# Altium PCB MSE-PCB-N3.PcbDoc
Units mil, origin at the board's own origin, x right, y up, seen from the top; angles counter-clockwise.
Board outline 1377.95 x 2992.13 mil, 2 copper layers (Top Layer, Bottom Layer); 78 components, 49 nets, 215 pads, 75 vias.
Unrouted connection lines stored in the file: 31.
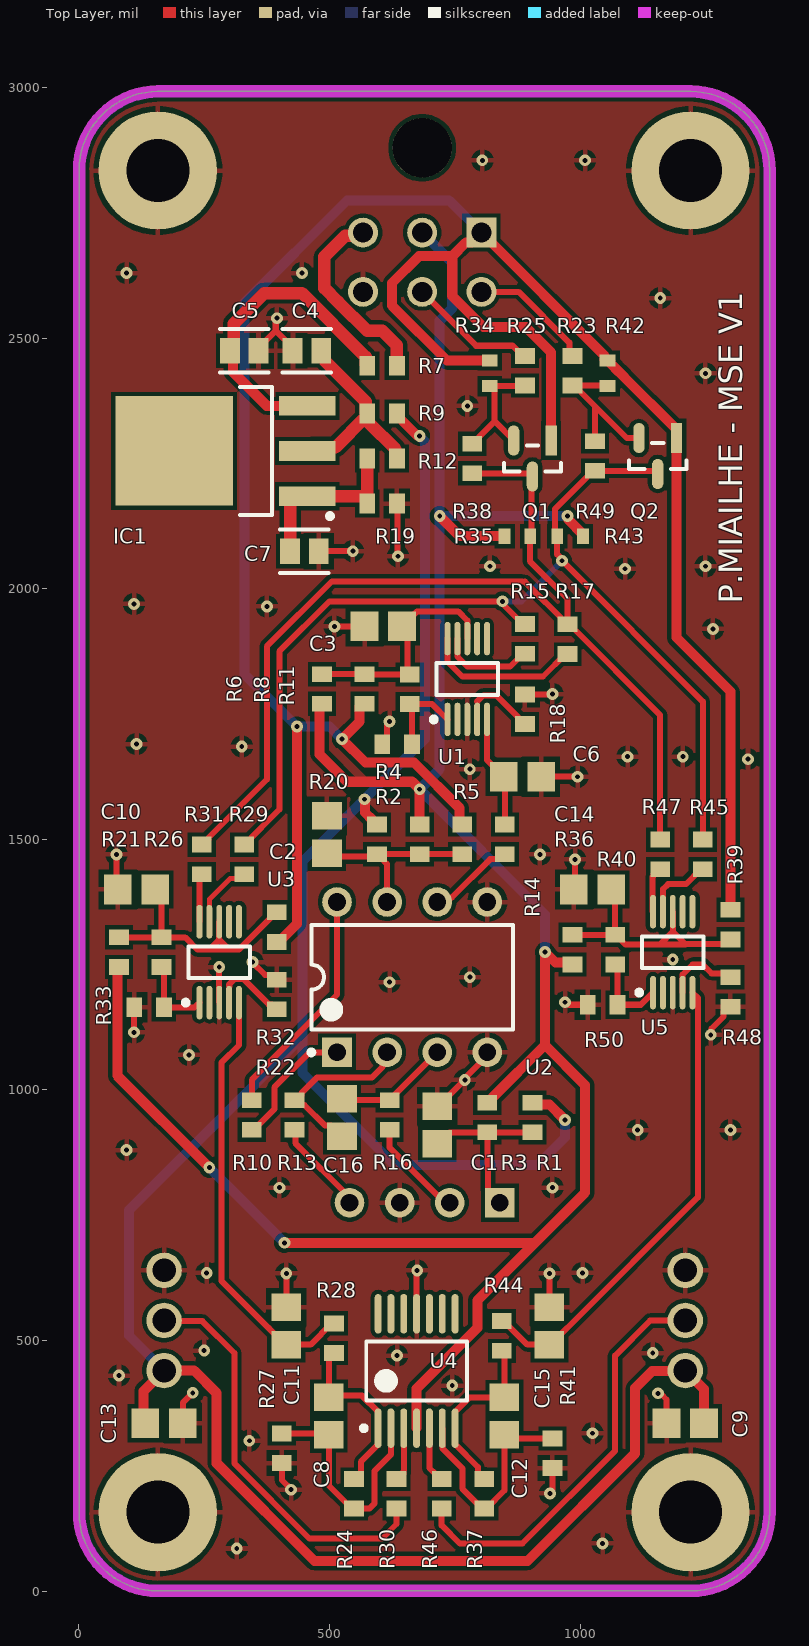
[diagram p0: Top Layer view]
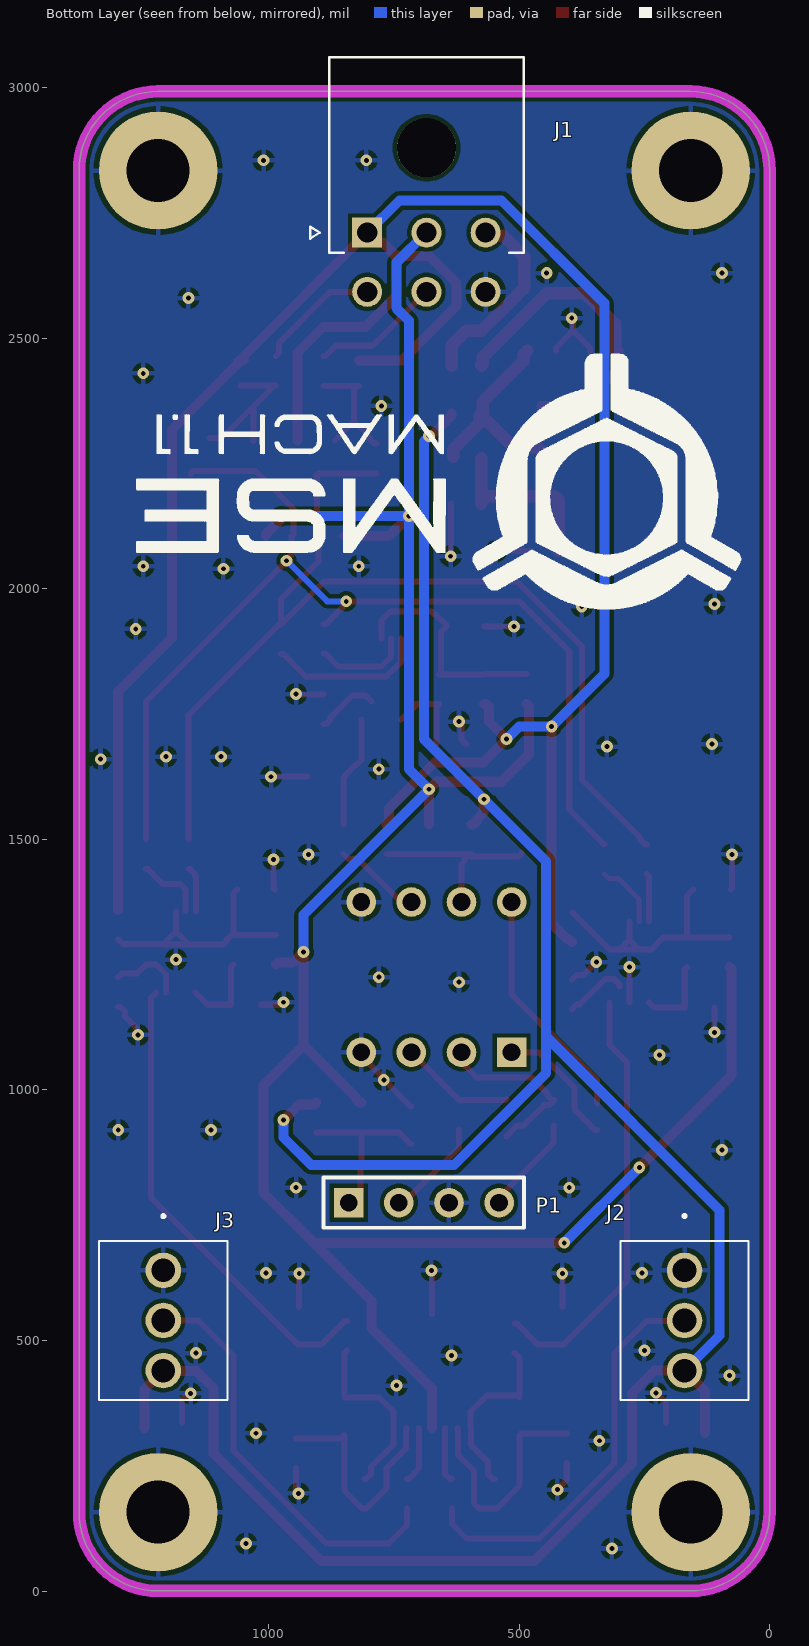
[diagram p1: Bottom Layer view, seen from below]
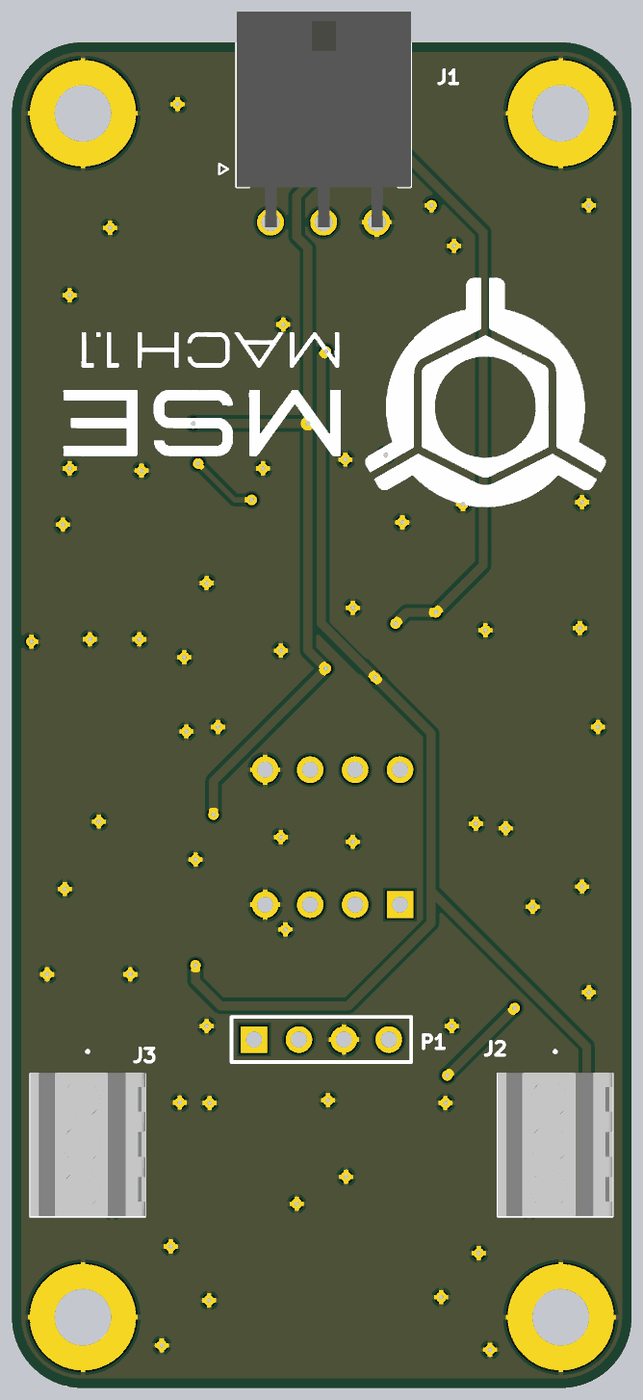
[diagram p2: 3D render of the assembled board from below, using the file's embedded part models]

## Layer stack, top to bottom
Top Solder: solder mask 0.4, Solder Resist, Dk 3.5
Top Layer: signal copper 1.4
Dielectric 1: dielectric 12.6, FR-4, Dk 4.8
Bottom Layer: signal copper 1.4
Bottom Solder: solder mask 0.4, Solder Resist, Dk 3.5

## Board outline
157.73,0.25 cw(c157.73,157.73) 0.25,157.73 0.25,2834.9 cw(c157.73,2834.9) 157.73,2992.38 1220.72,2992.38 cw(c1220.72,2834.9) 1378.2,2834.9 1378.2,157.73 cw(c1220.72,157.73) 1220.72,0.25

## Design rules (kind name [scope] priority, off if disabled: settings)
Clearance [All] p1: gap=8 ignorepadtopadclearanceinfootprint=TRUE except(0: Arc-Hole Track-Hole SMDPad-Hole THPad-Hole Via-Hole Fill-Hole Poly-Hole Region-Hole Text-Hole; 7: Arc-Arc Arc-Track Arc-SMDPad Arc-THPad Arc-Via Track-Track Track-SMDPad Track-THPad Track-Via SMDPad-SMDPad SMDPad-THPad SMDPad-Via THPad-THPad THPad-Via Via-Via; 10: Arc-Text Track-Text SMDPad-Text THPad-Text Via-Text Fill-Text Poly-Text Region-Text Text-Text)
PolygonConnect [All] p1: connectstyle=Relief reliefconductorwidth=10 reliefentries=4 polygonreliefangle="90 Angle" airgapwidth=10
RoutingVias "RoutingVias <= 0.45mm" [All] p1: holewidth=11.81 width=25.59 viastyle="Through Hole" minholewidth=9.84 minwidth=23.62 maxholewidth=17.72 maxwidth=31.5
RoutingVias "RoutingVias > 0.45" [All] p2: holewidth=19.68 width=33.47 viastyle="Through Hole" minholewidth=19.68 minwidth=33.47 maxholewidth=35.43 maxwidth=49.21
SolderMaskExpansion [All] p1: expansion=4 istentingtop=FALSE
Width [All] p1: maxlimit=30 minlimit=6 preferedwidth=10 minimp=50.000000 maximp=50.000000 favimp=50.000000
30 further rules are at their usual default settings.

## Components (designator, comment, footprint, x,y, rotation, side; value= is the part's Value field where it differs from the comment)
C1 "GRM21BR71H104KA01L" CAPC2013X135X45ML10T25 715,930 r270 top locked
C2 "GRM21BR71H104KA01L" CAPC2013X135X45ML10T25 495,1510 r270 top locked
C3 "GRM21BR71H104KA01L" CAPC2013X135X45ML10T25 607.4,1925 r0 top locked
C4 "GRM21BR61E106KA73L" FP-GRM21B-0_15-IPC_C 455,2475 r180 top locked
C5 "GRM21BR61E106KA73L" FP-GRM21B-0_15-IPC_C 330,2475 r0 top
C6 "GRM21BR71H104KA01L" CAPC2013X135X45ML10T25 885,1625 r0 top locked
C7 "GRM21BR61E106KA73L" FP-GRM21B-0_15-IPC_C 450,2075 r0 top
C8 "GRM21BR71H104KA01L" CAPC2013X135X45ML10T25 498.82,349.17 r270 top locked
C9 "GRM21BR71H104KA01L" CAPC2013X135X45ML10T25 1210,335 r0 top locked
C10 "GRM21BR71H104KA01L" CAPC2013X135X45ML10T25 115,1400 r0 top locked
C11 "GRM21BR71H104KA01L" CAPC2013X135X45ML10T25 413.82,529.17 r90 top locked
C12 "GRM21BR71H104KA01L" CAPC2013X135X45ML10T25 848.82,349.17 r270 top locked
C13 "GRM21BR71H104KA01L" CAPC2013X135X45ML10T25 170,335 r180 top locked
C14 "GRM21BR71H104KA01L" CAPC2013X135X45ML10T25 1025,1400 r0 top locked
C15 "GRM21BR71H104KA01L" CAPC2013X135X45ML10T25 938.82,529.17 r90 top locked
C16 "GRM21BR71H104KA01L" CAPC2013X135X45ML10T25 525,945 r90 top
IC1 "NCP1117DTARKG" TO229P990X238-4N 292.36,2275 r180 top locked
J1 "2125280601" MOLEX_2125280601 803.11,2710.71 r0 bottom locked
J2 "282834-3" 2828343 170,640 r270 bottom locked
J3 "282834-3" 2828343 1210,640 r270 bottom locked
P1 "26PCGFA6D" HDR1X4 840,775 r180 bottom locked
Q1 "BSS138" FP-318-08-IPC_B 905,2260 r270 top
Q2 "BSS138" FP-318-08-IPC_B 1155,2265 r270 top
R1 "0R" RESC1608X55X25ML10T15 905,945 r270 top locked
R2 "0R" RESC1608X55X25ML10T15 595,1500 r270 top locked
R3 "0R" RESC1608X55X25ML10T15 815,945 r270 top locked
R4 "0R" RESC1608X55X25ML10T15 680,1500 r270 top locked
R5 "0R" RESC1608X55X25ML10T15 765,1500 r270 top locked
R6 "0R" RESC1608X55X25ML10T15 485,1800 r270 top locked
R7 "0R" RESC1608X55X25ML10T15 605,2445 r180 top locked
R8 "0R" RESC1608X55X25ML10T15 570,1800 r270 top locked
R9 "0R" RESC1608X55X25ML10T15 605,2350 r180 top locked
R10 "GAIN" RESC1608X55X25ML10T15 345,950 r90 top
R11 "0R" RESC1608X55X25ML10T15 660,1799.53 r270 top locked
R12 "GAIN" RESC1608X55X25ML10T15 605,2260 r180 top
R13 "0R" RESC1608X55X25ML10T15 430,950 r270 top
R14 "0R" RESC1608X55X25ML10T15 850,1500 r270 top locked
R15 "0R" RESC1608X55X25ML10T15 890,1900 r90 top locked
R16 "0R" RESC1608X55X25ML10T15 620,950 r270 top locked
R17 "0R" RESC1608X55X25ML10T15 975,1899.53 r90 top locked
R18 "0R" RESC1608X55X25ML10T15 890,1759.53 r270 top locked
R19 "GAIN" RESC1608X55X25ML10T15 605,2170 r180 top
R20 "0R" RESC1608X55X25ML10T15 635,1690 r180 top locked
R21 "0R" RESC1608X55X25ML10T15 80,1275 r270 top locked
R22 "0R" RESC1608X55X25ML10T15 395,1325 r270 top locked
R23 "0R" RESC1608X55X25ML10T15 985,2435 r270 top locked
R24 "0R" RESC1608X55X25ML10T15 548.82,194.17 r270 top locked
R25 "0R" RESC1608X55X25ML10T15 890,2435 r270 top locked
R26 "0R" RESC1608X55X25ML10T15 165,1275 r270 top locked
R27 "NC" RESC1608X55X25ML10T15 405,285 r90 top locked
R28 "0R" RESC1608X55X25ML10T15 508.82,504.65 r270 top locked
R29 "0R" RESC1608X55X25ML10T15 330,1460 r90 top locked
R30 "0R" RESC1608X55X25ML10T15 633.82,194.17 r270 top locked
R31 "0R" RESC1608X55X25ML10T15 245,1460 r90 top locked
R32 "0R" RESC1608X55X25ML10T15 395,1190.47 r270 top locked
R33 "0R" RESC1608X55X25ML10T15 140,1165 r180 top locked
R34 "RC0603FR-074K7L" RESC1608X55X25LL10T15 820,2430 r90 top
R35 "RC0603FR-074K7L" RESC1608X55X25LL10T15 875,2105 r180 top
R36 "0R" RESC1608X55X25ML10T15 985,1280 r270 top locked
R37 "0R" RESC1608X55X25ML10T15 808.82,194.17 r270 top locked
R38 "NC" RESC1608X55X25ML10T15 785,2260 r270 top
R39 "0R" RESC1608X55X25ML10T15 1300,1330 r90 top
R40 "0R" RESC1608X55X25ML10T15 1070,1280 r270 top locked
R41 "NC" RESC1608X55X25ML10T15 945,275 r90 top locked
R42 "RC0603FR-074K7L" RESC1608X55X25LL10T15 1055,2430 r90 top
R43 "RC0603FR-074K7L" RESC1608X55X25LL10T15 980,2105 r0 top
R44 "0R" RESC1608X55X25ML10T15 843.82,509.17 r270 top locked
R45 "0R" RESC1608X55X25ML10T15 1245,1470 r90 top locked
R46 "0R" RESC1608X55X25ML10T15 723.82,194.17 r270 top locked
R47 "0R" RESC1608X55X25ML10T15 1160,1470 r90 top locked
R48 "0R" RESC1608X55X25ML10T15 1300,1195.47 r90 top locked
R49 "NC" RESC1608X55X25ML10T15 1030,2265 r270 top
R50 "0R" RESC1608X55X25ML10T15 1045,1170 r180 top locked
U1 "ADS1013IDGSR" TI-DGS10_N 775,1820 r90 top locked
U2 "INA121PA" P0008A 665,1225 r90 top locked
U3 "ADS1013IDGSR" TI-DGS10_N 280,1255 r90 top locked
U4 "MCP6004-I/ST" TSSOP-ST14_M 673.82,439.17 r90 top locked
U5 "ADS1013IDGSR" TI-DGS10_N 1185,1275 r90 top locked

## Footprints (in the part's own frame and the unit in brackets; to place one, negate y for a bottom-side part, rotate by r counter-clockwise, add the part's x,y. Pads: shape width x height; smd on the part's side, far side on the other; paste and mask are expansions set on the pad)
2828343 [mm]
  round 1.8 hole 1.2: 1(0,0) 2(2.54,0) 3(5.08,0)
  silkscreen extent -2.8,-3.25 6.58,3.25, body extent -1.55,-3.25 6.53,3.25, height 9.89
CAPC2013X135X45ML10T25 [mm] "Chip Capacitor, 2-Leads, Body 2.10x1.35mm, IPC Low Density"
  rect 1.4x1.5 smd: 1(-0.95,0) 2(0.95,0)
  body extent -1.05,-0.67 1.05,0.67, height 1.35
FP-318-08-IPC_B [mm]
  rect 1.524x0.578 smd paste+0 mask+0: 1(-0.91,0.95)
  rrect100% 1.524x0.578 smd paste+0 mask+0: 2(-0.91,-0.95) 3(0.91,0)
  silkscreen extent -0.65,-1.45 0.65,1.45, body extent -1.92,-1.7 1.92,1.7, height 0.25
FP-GRM21B-0_15-IPC_C [mil]
  rect 39.6x51.5 smd paste+0 mask+0: 1(-28.59,0) 2(28.59,0)
  silkscreen extent -48,-43 48,43, body extent -52,-31 52,31, height 10
HDR1X4 [mm] "Connector; Header; 4 Position"
  rect 1.5x1.5 hole 0.9: 1(0,0)
  round 1.5 hole 0.9: 2(2.54,0) 3(5.08,0) 4(7.62,0)
  silkscreen extent -1.27,-1.27 8.89,1.27
MOLEX_2125280601 [mm]
  rect 1.52x1.52 / inner round 1.52 / far side rect 1.52x1.52 hole 1.02 mask+0.076: 1(0,0)
  round 1.52 hole 1.02 mask+0.076: 2(-3,0) 3(-6,0) 4(0,3) 5(-3,3) 6(-6,3)
  round 3 hole 3 unplated mask+0.076: ""(-3,-4.3)
  silkscreen extent -7.93,-8.9 2.9,1.01, body extent -7.94,-8.89 1.91,3.29, height 8.81
P0008A [mm] "DIP, 8-Leads, Body 10.15x6.6mm, Pitch 2.54mm"
  rect 1.5x1.5 hole 0.9: 1(-3.81,3.81)
  round 1.5 hole 0.9: 2(-3.81,1.27) 3(-3.81,-1.27) 4(-3.81,-3.81) 5(3.81,-3.81) 6(3.81,-1.27) 7(3.81,1.27) 8(3.81,3.81)
  silkscreen extent -3.93,-5.1 2.65,5.23, body extent -3.95,-5.07 3.95,5.07, height 5.08
RESC1608X55X25LL10T15 [mm] "Chip Resistor, 2-Leads, Body 1.60x0.80mm, IPC High Density"
  rect 0.6x0.8 smd: 1(-0.65,0) 2(0.65,0)
  body extent -0.85,-0.45 0.85,0.45, height 0.55
RESC1608X55X25ML10T15 [mm] "Chip Resistor, 2-Leads, Body 1.60x0.80mm, IPC Low Density"
  rect 0.8x1 smd: 1(-0.75,0) 2(0.75,0)
  body extent -0.85,-0.45 0.85,0.45, height 0.55
TI-DGS10_N [mm] "SOP, 10-Leads, Body 3x3mm, Pitch 0.5mm, IPC Medium Density"
  oval 1.7x0.3 smd: 1(-2.05,1) 2(-2.05,0.5) 3(-2.05,0) 4(-2.05,-0.5) 5(-2.05,-1) 6(2.05,-1) 7(2.05,-0.5) 8(2.05,0) 9(2.05,0.5) 10(2.05,1)
  silkscreen extent -2.17,-1.55 0.8,1.82, body extent -1.55,-1.55 1.55,1.55, height 1.1
TO229P990X238-4N [mm]
  rect 2.85x1 smd: 1(-4.15,2.29) 2(-4.15,0) 3(-4.15,-2.29)
  rect 5.95x5.55 smd: 4(2.6,0)
  silkscreen extent -5.43,-3.25 -0.75,3.42, body extent -4.96,-3.27 4.96,3.27, height 2.39
TSSOP-ST14_M [mm] "TSOP, 14-Leads, Body 5x4.4mm, Pitch 0.65mm, IPC Low Density"
  oval 2x0.35 smd: 1(-2.9,1.95) 2(-2.9,1.3) 3(-2.9,0.65) 4(-2.9,0) 5(-2.9,-0.65) 6(-2.9,-1.3) 7(-2.9,-1.95) 8(2.9,-1.95) 9(2.9,-1.3) 10(2.9,-0.65) 11(2.9,0) 12(2.9,0.65) 13(2.9,1.3) 14(2.9,1.95)
  silkscreen extent -3.02,-2.55 1.5,2.8, body extent -2.25,-2.55 2.25,2.55, height 1.2

## Part data
C1 C2 C3 C9 C10 C13 C14: library part CMP-2100-03644-1, "Chip Capacitor, 0.1 uF, +/- 10%, 50 V, -55 to 125 degC, 0805 (2012 Metric), RoHS, Tape and Reel", Capacitance=100nF, Case Code (Imperial)=0805, Case Code (Metric)=2012, Dielectric=X7R, Dielectric Material=Ceramic, Insulation Resistance=10GR, Manufacturer=Murata, Max Operating Temperature=125degC, Min Operating Temperature=-55degC, Package Description="2-Pin Surface Mount Device, Body 2 x 1.25 mm", Package Quantity=1, Tolerance=10%, Voltage=50V, Case/Package=0805, Datasheet URL=http://psearch.en.murata.com/capacitor/product/GRM21BR71H104KA01%23.pdf, Datasheet Version=42675.0, Depth=1.25mm, Height=1.25mm, Lead Free=LeadFree, Length=2mm, Manufacturer URL=http://www.murata.com/, Material=Ceramic, Mount=SurfaceMount, Number of Pins=2, Package Reference=0805, Packaging=TapeandReel, Radiation Hardening=No, REACH SVHC=Unknown, RoHSCompliant=true, Termination=SMD/SMT, Thickness=0.053inch, Voltage Rating=50V, Voltage Rating (DC)=50V, Width=0.049inch
C4 C5 C7: library part CMP-2007-03541-2, "Chip Multilayer Ceramic Capacitors for General Purpose, 0805, 10uF, X5R, 15%, 10%, 25V", Capacitance=10uF, Case Code (Imperial)=0805, Case Code (Metric)=2012, Dielectric=X5R, Max Operating Temperature=85°C, Min Operating Temperature=-55°C, Package Quantity=1, Tolerance=10%, Voltage=25V, Case/Package=0805, Depth=1.25mm, Height=1.25mm, Lead Free="Lead Free", Length=2mm, Material=Ceramic, Mount="Surface Mount", Packaging="Tape and Reel", Radiation Hardening=No, Termination=SMD/SMT, Thickness=0.053inch, Voltage Rating=25V, Voltage Rating (DC)=25V, Width=0.049inch
C6 C8 C11 C12 C15 C16: library part CMP-2100-03644-1, "Chip Capacitor, 0.1 uF, +/- 10%, 50 V, -55 to 125 degC, 0805 (2012 Metric), RoHS, Tape and Reel", Capacitance=NC, Case Code (Imperial)=0805, Case Code (Metric)=2012, Dielectric=X7R, Dielectric Material=Ceramic, Insulation Resistance=10GR, Manufacturer=Murata, Max Operating Temperature=125degC, Min Operating Temperature=-55degC, Package Description="2-Pin Surface Mount Device, Body 2 x 1.25 mm", Package Quantity=1, Tolerance=10%, Voltage=50V, Case/Package=0805, Datasheet URL=http://psearch.en.murata.com/capacitor/product/GRM21BR71H104KA01%23.pdf, Datasheet Version=42675.0, Depth=1.25mm, Height=1.25mm, Lead Free=LeadFree, Length=2mm, Manufacturer URL=http://www.murata.com/, Material=Ceramic, Mount=SurfaceMount, Number of Pins=2, Package Reference=0805, Packaging=TapeandReel, Radiation Hardening=No, REACH SVHC=Unknown, RoHSCompliant=true, Termination=SMD/SMT, Thickness=0.053inch, Voltage Rating=50V, Voltage Rating (DC)=50V, Width=0.049inch
IC1: "Integrated Circuit", Manufacturer_Name=onsemi, Mouser Part Number=863-NCP1117DTARKG, Arrow Part Number=NCP1117DTARKG, Arrow Price/Stock=https://www.arrow.com/en/products/ncp1117dtarkg/on-semiconductor?region=nac, Datasheet Link=http://www.onsemi.com/pub/Collateral/NCP1117-D.PDF, Height=2.38mm, Manufacturer_Part_Number=NCP1117DTARKG, Mouser Price/Stock=https://www.mouser.co.uk/ProductDetail/onsemi/NCP1117DTARKG?qs=Gev%252BmEvV0iZIb8c1g2fW3A%3D%3D
J1: library part CMP-013-000000-2, "Connector Header Through Hole, Right Angle 6 position 0.118 (3.00mm)", Package=None, Availability="In Stock", Check_prices=https://www.snapeda.com/parts/2125280601/Molex/view-part/?ref=eda, Component Type=Standard, Design Item ID=2125280601, MF=Molex, MP=2125280601, Pin Count=6, Price=None, Purchase-URL=https://pricing.snapeda.com/search/part/2125280601/?ref=eda, SnapEDA_Link=https://www.snapeda.com/parts/2125280601/Molex/view-part/?ref=snap, Source=2125280601.SchLib
J2 J3: "Connector", Manufacturer_Name="TE Connectivity", Mouser Part Number=571-2828343, Arrow Part Number=282834-3, Arrow Price/Stock=https://www.arrow.com/en/products/282834-3/te-connectivity?region=europe, Datasheet Link=https://www.te.com/commerce/DocumentDelivery/DDEController?Action=showdoc&DocId=Customer+Drawing%7F282834%7FC1%7Fpdf%7FEnglish%7FENG_CD_282834_C1.pdf%7F282834-3, Height=10mm, Manufacturer_Part_Number=282834-3, Mouser Price/Stock=https://www.mouser.co.uk/ProductDetail/TE-Connectivity/282834-3?qs=A%252Bip%252BNCYi6M69kAjqV38yA%3D%3D
P1: library part "Header 4", "Header, 4-Pin", LatestRevisionDate=17-Jul-2002, LatestRevisionNote="Re-released for DXP Platform.", Publisher="Altium Limited"
Q1 Q2: library part CMP-07173-000101-1, "MOSFET N-CH 50V 220MA SOT-23", Case/Package=SOT-23, Continuous Drain Current (ID)=220mA, Drain to Source Breakdown Voltage=50V, Drain to Source Resistance=3.5R, Gate to Source Voltage (Vgs)=20V, Input Capacitance=27pF, Max Operating Temperature=150°C, Max Power Dissipation=360mW, Min Operating Temperature=-55°C, On-State Resistance=6R, Package Quantity=1, Threshold Voltage=1.3V, Contact Plating=Tin, Current Rating=220mA, Drain to Source Voltage (Vdss)=50V, Dual Supply Voltage=50V, Element Configuration=Single, Fall Time=9ns, Height=0.93mm, Lead Free="Lead Free", Length=2.92mm, Mount="Surface Mount", Nominal Vgs=1.3V, Number of Elements=1, Number of Pins=3, Packaging="Tape and Reel", Power Dissipation=360mW, Radiation Hardening=No, Rds On Max=3.5R, REACH SVHC="No SVHC", Rise Time=9ns, Termination=SMD/SMT, Turn-Off Delay Time=20ns, Turn-On Delay Time=2.5ns, Voltage Rating (DC)=50V, Weight=0.03g, Width=1.3mm
R1 R2 R3 R4 R5 R6 R7 R8 R9 R10 R11 R12 R13 R14 R15 R16 R17 R18 R19 R20 R21 R22 R23 R24 R25 R26 R27 R28 R29 R30 R31 R32 R33 R36 R37 R38 R39 R40 R41 R44 R45 R46 R47 R48 R49 R50: library part CMP-2100-03667-1, "Chip Resistor, 0 Ohm, +/- 5%, 0.1 W, -55 to 155 degC, 0603 (1608 Metric), RoHS, Tape and Reel", Case Code (Imperial)=0603, Case Code (Metric)=1608, Manufacturer=Yageo, Max Operating Temperature=155degC, Min Operating Temperature=-55degC, Package Description="2-Pin Surface Mount Device, Body 1.6 x 0.8 mm", Package Quantity=5000, Power Rating=100mW, Resistance=0mOhm, Temperature Coefficient=200ppm/degreesC, Tolerance=5%, Voltage Rating=50V, Case/Package=0603, Composition=ThickFilm, Contact Plating=Tin, Datasheet URL=http://www.yageo.com/NewPortal/yageodocoutput?fileName=/pdf/R-Chip/PYu-RC_Group_51_RoHS_L_5.pdf, Datasheet Version="Rev. 5, 10/2016", Depth=0.8mm, Height=0.45mm, Lead Free=LeadFree, Length=1.6mm, Manufacturer URL=http://www.yageo.com/, Military Standard=Not, Number of Pins=2, Package Reference=0603, Packaging=TapeandReel, Radiation Hardening=No, REACH SVHC=NoSVHC, RoHSCompliant=true, Termination=SMD/SMT, Voltage Rating (DC)=50V, Width=0.8mm
R34 R35 R42 R43: library part CMP-2000-06942-1, "Chip Resistor, 4.7 KOhm, +/- 1%, 0.1 W, -55 to 155 degC, 0603 (1608 Metric), RoHS, Tape and Reel", Case Code (Imperial)=0603, Case Code (Metric)=1608, Manufacturer=Yageo, Max Operating Temperature=155°C, Max Power Dissipation=100mW, Min Operating Temperature=-55°C, Operating Temperature Range=-55Cto+155C, Package Description="2-Pin Surface Mount Device, Body 1.6 x 0.8 mm", Resistance=4.7k, Resistance Tolerance=1%, Resistor Type="Thick Film", Supplier Part Number 1=603-RC0603FR-074K7L, Temperature Coefficient=100PPM/C, Voltage Rating=50V, Case Code - mm=1608, Case/Package=0603, Category="Chip SMD Resistors", ComponentLink1Description=https://datasheet.ciiva.com/15189/getdatasheetpartid-422754-15189760.pdf?src-supplier=Verical, ComponentLink1URL=https://datasheet.ciiva.com/15189/getdatasheetpartid-422754-15189760.pdf?src-supplier=Verical, ComponentLink2Description=https://datasheet.ciiva.com/22747/443971-22747528.pdf?src-supplier=Element14, ComponentLink2URL=https://datasheet.ciiva.com/22747/443971-22747528.pdf?src-supplier=Element14, ComponentLink3Description=https://datasheet.ciiva.com/7660/38590-7660794.pdf?src-supplier=Element14, ComponentLink3URL=https://datasheet.ciiva.com/7660/38590-7660794.pdf?src-supplier=Element14, ComponentLink4Description=https://datasheet.ciiva.com/7746/1868787-7746365.pdf?src-supplier=Element14, ComponentLink4URL=https://datasheet.ciiva.com/7746/1868787-7746365.pdf?src-supplier=Element14, ComponentLink5Description=https://datasheet.ciiva.com/46440/1868787-46440909.pdf?src-supplier=Element14, ComponentLink5URL=https://datasheet.ciiva.com/46440/1868787-46440909.pdf?src-supplier=Element14, ComponentLink6Description=https://datasheet.ciiva.com/7746/1738695-7746366.pdf?src-supplier=Element14, ComponentLink6URL=https://datasheet.ciiva.com/7746/1738695-7746366.pdf?src-supplier=Element14, Construction=Rectangular, Datasheet URL=http://www.yageo.com/documents/recent/PYu-RC_Group_51_RoHS_L_7.pdf, Datasheet Version="Rev. 7, 05/2017", Depth=0.8mm, Features="Moisture Resistant", Height=0.45mm, Lead Free="Lead Free", Lead Pitch=0.3mm, Length=1.6mm, Manufacturer Part Number=RC0603FR-074K7L, Manufacturer URL=http://www.yageo.com/, Military Standard=Not, Mounting Technology=SurfaceMount, Number of Pins=2, Number of Terminations=2, Package Reference=0603, Packaging=Reel, Power Rating=100mW, Pricing 1="1=0,10000, 10=0,02400, 50=0,02400, 100=0,01000, 1000=0,00400, 5000=0,00300, 10000=0,00300 (USD)", Product=ThickFilmResistorsGeneralPurpose, REACH SVHC="No SVHC", RoHS=Yes, RoHS Compliant=Yes, Series=RC, Size Code=0603, Stock 1=772810, Supplier 1=Mouser, Termination=SMD/SMT, Termination Style=SMD/SMT, Tolerance=1%, Voltage Rating (DC)=50V, Width=0.8mm
U1 U3 U5: library part CMP-0003-00388-2, "12-Bit ADC with Integrated Oscillator, and Reference, -40 to 125 degC, 10-pin SOP (DGS10), Green (RoHS & no Sb/Br)", Analog Voltage AV/DD(Max)(V)=5.5, Analog Voltage AV/DD(Min)(V)=2, Manufacturer="Texas Instruments", # Input Channels=1, Architecture=Delta-Sigma, Code_JEDEC=MO-153, ComponentLink1Description="Manufacturer URL", ComponentLink1URL=http://www.ti.com/, ComponentLink2Description=Datasheet, ComponentLink2URL=http://www.ti.com/general/docs/lit/getliterature.tsp?genericPartNumber=ADS1013&fileType=pdf, ComponentLink3Description="Package Specification", ComponentLink3URL=http://www.ti.com/lit/ml/mpds035b/mpds035b.pdf, DatasheetVersion=SBAS473C, Digital Supply(Max)(V)=5.5, Digital Supply(Min)(V)=2, Eco-Plan="Green (RoHS & no Sb/Br)", INL(Max)(+/-LSB)=0.5, Interface="Serial I2C", Mounting Technology="Surface Mount", PackageDescription="10-Pin Plastic Small Outline, Body 3 x 3 mm, Pitch 0.5 mm", PackageReference=DGS10, PackageVersion="4073272/C, 02/2004", PartNumber=ADS1013IDGSR, Resolution(Bits)=12, Sample Rate (max)(SPS)=3.3k, SubFamily="Precision ADC (<=10MSPS)"
U2: library part CMP-0992-00120-2, "FET-Input, Low Power Instrumentation Amplifier, -40 to 85 degC, 8-pin DIP (P8), Green (RoHS & no Sb/Br)", Input Bias Current (+/-)(Max)(nA)=0.05, Manufacturer="Texas Instruments", Quiescent Current (+/-)(Typ)(mA)=0.45, CMRR(Min)(dB)=90, Code_JEDEC=MS-001, ComponentLink1Description="Manufacturer URL", ComponentLink1URL=http://www.ti.com/, ComponentLink2Description=Datasheet, ComponentLink2URL=http://www.ti.com/general/docs/lit/getliterature.tsp?genericPartNumber=INA121&fileType=pdf, ComponentLink3Description="Package Specification", ComponentLink3URL=http://www.ti.com/litv/pdf/mpdi001b, DatasheetVersion=SBOS078, Eco-Plan="Green (RoHS & no Sb/Br)", Gain(V/V)="1 to 10000", Input Offset (+/-)(Max)(uV)=1000, Input Offset Drift (+/-)(Max)(uV/Degrees Celsius)=15, Mounting Technology="Through Hole", Noise at 1kHz(Typ)(nV/rt(Hz))=20, Non-Linearity (+/-)(Max)(%)=0.008, Number of Channels=1, Output Offset (+/-)(Max)(uV)=1000/G, Output Offset Drift (+/-)(Max)(uV/Degrees Celsius)=20/G, PackageDescription="8-Pin Plastic In-Line, Body 9.59 x 6.35 mm, Pitch 2.54 mm", PackageReference=P0008A, PackageVersion="4040082/E, 04/2010", PartNumber=INA121PA, SubFamily="Dual Supply", Vs(Max)(V)=36, Vs(Min)(V)=4.5
U4: library part CMP-0187-00579-3, "None", Case/Package=TSSOP, Frequency=3MHz, Input Bias Current=1pA, Input Offset Voltage (Vos)=4.5mV, Max Operating Temperature=85°C, Max Supply Voltage=6V, Min Operating Temperature=-40°C, Min Supply Voltage=1.8V, Nominal Supply Current=100uA, Operating Supply Voltage=5.5V, Output Current=23mA, Package Quantity=96, Power Supply Rejection Ratio (PSRR)=86dB, Voltage Gain=112dB, Amplifier Type="GENERAL PURPOSE", Bandwidth=1MHz, Common Mode Rejection Ratio=60dB, Contact Plating=Tin, Gain Bandwidth Product=1MHz, Height=0.9mm, Input Offset Voltage-Max=4.5mV, Lead Free="Lead Free", Length=5mm, Mount="Surface Mount", Number of Amplifiers=4, Number of Channels=4, Number Of Circuits=4, Number of Elements=4, Number of Pins=14, Packaging=Rail/Tube, Radiation Hardening=No, REACH SVHC="No SVHC", RoHS Compliant=Yes, Slew Rate=0.6V/µs, Slew Rate-Nom=0.6V/µs, Supply Current=100uA, Technology=CMOS, Unity Gain Bandwidth Product=1MHz, Width=4.4mm

## Free pads (board coordinates)
  round 236.22 hole 125.98: 8(157.48,157.48) 8(157.48,2834.65) 8(1220.47,157.48) 8(1220.47,2834.65)

## Via types
v1: diameter 23.62, hole 9.84, Top Layer to Bottom Layer, 75 vias

## Nets (pads, with @x,y where several pads share a name; then routed paths per layer and width w, separated by ;. In a path a pad name is that pad's centre, name@x,y a point inside that pad or via, vN(x,y) a via of type N, cw(c..) or ccw(c..) an arc to the next point about the centre after c; other vN are vias at no path point)
+3V3: J1.1 Q1.1 Q2.1 R5.1 R8.2 R22.2 R34.2 R39.2 R42.2 | length 5004.4
  Top Layer w20: R22.2 400.75,1301.22 404.69,1301.22 435,1331.54 v1(435,1725) ; R8.2 566.06,1770.47 560.31,1764.72 560.31,1735.31 v1(525,1700) 571.69,1653.31 668.84,1653.31 759.89,1562.27 759.89,1534.64 R5.1 ; J1.1@802.86,2710.46 783.19,2690.79 772,2690.79 745,2663.79 ; J1.1 1049.25,2464.57 1049.25,2457.4 1051.06,2455.59 R42.2 R42.2@1058.23,2455.59 ; R34.2 734.41,2455.59 625,2565 625,2610 678.79,2663.79 745,2663.79 ; Q1.1 942.4,2471.6 891.62,2522.38 806.97,2522.38 745,2584.35 745,2663.79 ; R42.2@1058.94,2455.59 1060.75,2453.78 1060.75,2449.84 1077.37,2433.22 1077.79,2433.22 1087.75,2423.26 1087.75,2422.84 1189.75,2320.84 1192.4,2318.19 Q2.1 1192.4,1902.6 1300,1795 R39.2
  Bottom Layer w20: v1(435,1725) 330,1830 330,2570 535,2775 738.82,2775 J1.1 ; v1@435.98,1725 500,1725 v1(525,1700)
+5V: J1.2 R3.1 R4.1 R6.2 R21.2 R35.2 R36.2 R43.2 U4.4 | length 4986.9
  Top Layer w20: R21.2 76.72,1242.2 76.72,1028.46 v1(260.19,845) ; v1(410,695) 910,695 ; R6.2 480.19,1765.66 480.19,1669.81 535,1615 665,1615 v1(680,1600) R4.1 ; U4.4 673.82,403.82 795,525 795,580 910,695 ; v1(720,2145) 760,2105 R35.2 ; R3.1 818.94,974.53 824.69,980.28 824.69,984.21 930,1089.53 ; v1(930,1275) 930,1089.53 ; v1@930.69,1274.31 950.83,1254.17 981.31,1254.17 R36.2 ; v1(975,2145) 975.69,2144.31 975.69,2138.83 1005.59,2108.94 R43.2 ; 910,695 1010,795 1010,1009.53 930,1089.53
  Bottom Layer w20: v1@260.88,844.31 260.88,844.21 410,695.09 v1(410,695) ; J1.2 745,2650.71 745,2560 720,2535 v1(720,2145) ; v1(930,1275) 930,1350 v1(680,1600) 720,1640 v1(720,2145) ; v1(975,2145) v1(720,2145)
+12V: C9.2 C13.2 J2.3 J3.3 R1.1 R2.1 R9.1 | length 4863.2
  Top Layer w20: C13.2@129.29,315 129.29,399.29 J2.3 230,440 275,395 275,255 470,60 895,60 1110,275 1110,405 1143.73,438.73 1208.73,438.73 J3.3 1210.25,440 1247.4,402.85 C9.2 C9.2@1247.4,325 ; v1(570,1580) 570.69,1579.31 570.69,1553.83 585.31,1539.21 585.31,1535.28 591.06,1529.53 R2.1 ; R9.1 634.53,2346.06 674.9,2305.69 679.31,2305.69 v1(680,2305) ; R1.1 908.69,970.83 939.17,970.83 v1@969.31,940.69
  Bottom Layer w20: J2.3 100,510 100,760 444,1104 ; v1(680,2305) 680,2304.02 690.19,2293.83 690.19,1700.19 v1(570,1580) 446,1456 446,1104 446,1034 630,850 915,850 970,905 v1(970,940)
+VIN: J1.3 R7.1 | length 392.3
  Top Layer w25: J1.3 560.22,2704.04 531.08,2704.04 490,2662.96 490,2600 517.47,2572.53 517.47,2572.13 546.42,2543.18 546.82,2543.18 575,2515 605,2515 634.53,2485.47 R7.1
GND: C1.1 C2.1 C3.1 C4.2 C5.2 C6.2 C7.2 C9.1 C10.1 C11.2 C13.1 C14.1 C15.2 J1.6 J2.1 J3.1 P1.3 pad.8 R18.1 R19.1 R20.2 R27.1 R32.1 R33.2 R41.1 R48.1 R50.2 U1.3 U2.4 U2.5 U3.3 U4.11 U5.3 | length 1609.7
  Top Layer w12: v1(75,1470) 75,1402.6 C10.1 ; v1(110,1115) 110.24,1115.24 110.24,1164.76 R33.2 ; C13.1 207.4,375.86 v1(227.19,395.65) ; U3.3 v1(280,1245) ; v1(346.06,1255) 371.31,1229.75 385.25,1229.75 R32.1 ; C5.2 358.59,2480.95 392.78,2515.14 ; v1(395,2540) 392.78,2537.78 392.78,2515.14 ; R27.1 405,221.72 423.49,203.23 v1(423.49,202.29) ; C11.2 v1(413.82,633.82) ; C4.2 426.41,2480.95 392.78,2514.59 392.78,2515.14 ; C7.2 v1(546.54,2075) ; v1(510,1925) C3.1 ; R20.2 615.22,1699.75 615.22,1727.08 620,1731.86 v1(620,1735) ; R19.1 635.53,2169 635.53,2066 v1(636.54,2065) ; U4.11 673.82,638.82 v1(675,640) ; C1.1 716.97,967.4 769.57,1020 v1(770,1020) 770,1023.14 815,1068.14 U2.4 ; R18.1 890.47,1789.53 944.53,1789.53 v1(945,1790) ; C6.2 v1(995,1625) ; C15.2 v1(938.82,633.82) ; v1(940,195) 940,198.14 945,203.14 R41.1 ; v1(970,1175) 973.14,1175 978.14,1170 R50.2 ; C14.1 990,1402.4 v1(990,1460) ; v1(1155.37,394.63) 1157.6,392.4 1162.42,392.4 1172.6,382.23 C9.1 ; v1@1184.68,1259.68 v1(1185,1260) ; v1(1260.81,1110) 1262.22,1111.41 1262.22,1122.22 1286.31,1146.31 1286.31,1156.2 1296.06,1165.94 R48.1
  other v1: 315,85 1045,95 340,300 1025,315 745,410 80,430 635,470 1145,475 250,480 255,635 1005,635 400,805 945,805 95,880 1115,920 1300,920 220,1070 620,1215 780,1225 920,1470 780,1640 1335,1660 1095,1665 1205,1665 325,1685 115,1690 1265,1920 375,1965 110,1970 1090,2040 820,2045 1250,2045 775,2365 1250,2430 1160,2580 95,2630 445,2630 805,2855 1010,2855
NetC1_2: C1.2 P1.1 R1.2 R3.2 | length 350.3
  Top Layer w12: C1.2 716.97,892.6 739.84,915.47 R3.2 ; P1.1 816.47,798.53 816.47,851.39 815,852.86 R3.2 ; R1.2 R3.2
NetC2_2: C2.2 R2.2 R4.2 R5.2 U2.7 | length 380.3
  Top Layer w12: C2.2 502.13,1465.47 595,1465.47 R2.2@596.25,1465.47 ; U2.7 615,1450.47 608.69,1456.79 608.69,1460.72 598.94,1470.47 R2.2 R4.2 R5.2
NetC3_2: C3.2 R6.1 R8.1 R11.1 U1.8 | length 462.8
  Top Layer w12: R6.1 R8.1 570.24,1829.29 R11.1@655.83,1829.29 ; R11.1 659.76,1829.29 R11.1@655.83,1829.29 ; U1.8 775,1936.73 756.73,1955 674.8,1955 668.33,1948.53 666.36,1948.53 644.8,1926.97 C3.2 655.83,1913.98 R11.1@655.83,1829.29
NetC4_1: C4.1 IC1.2 R9.2 R12.1 | length 421.4
  Top Layer w25: IC1.2 462.93,2282.19 511.59,2282.19 572.22,2342.81 R9.2@572.22,2346.75 ; C4.1 490.89,2467.7 490.89,2454.85 572.22,2373.52 572.22,2353.25 578.72,2346.75 578.72,2331.28 631.28,2278.72 R12.1@631.28,2263.25
NetC5_1: C5.1 IC1.3 R7.2 | length 640.5
  Top Layer w20: C5.1 307.19,2469.22 307.19,2432.81 321.79,2418.21 374.84,2365.16 IC1.3
  Top Layer w25: C5.1@305.97,2471.07 308.71,2473.81 308.71,2528.71 370,2590 444.75,2590 572.22,2462.52 572.22,2448.25 R7.2
NetC6_1: C6.1 R14.1 U1.5 | length 225.6
  Top Layer w12: U1.5@814.59,1739.29 814.59,1658.01 824.07,1648.53 826.04,1648.53 847.6,1626.97 C6.1 850,1622.6 R14.1
NetC7_1: C7.1 IC1.1 R12.2 R19.2 | length 354.2
  Top Layer w25: C7.1 421.41,2177.66 428.59,2184.84 IC1.1 564.57,2184.84 R19.2@575.47,2173.94 ; R19.2 R19.2@575.47,2173.94 ; R12.2 R19.2@575.47,2173.94
NetC8_1: C8.1 R24.1 R28.2 U4.1 | length 362
  Top Layer w12: R28.2 508.57,475.12 498.82,465.37 C8.1 502.24,390 564.53,390 597.05,357.48 U4.1 596.47,324.42 596.47,291.94 562.5,257.98 562.5,233.45 552.76,223.7 R24.1
NetC8_2: C8.2 R24.2 R27.2 U4.2 | length 474.1
  Top Layer w12: R27.2 496.06,314.53 C8.2 498.82,210.71 544.88,164.65 R24.2 579.65,164.65 590,175 590,240 622.3,272.3 622.3,324.66 U4.2
NetC10_2: C10.2 R21.1 R22.1 R26.1 U3.8 | length 547.7
  Top Layer w12: R21.1 R26.1 ; C10.2 165,1387.4 R26.1 ; U3.8 280,1299.68 ; 300,1279.97 299.71,1279.97 ; R22.1@393.9,1354.53 319.34,1279.97 299.71,1279.97 ; R26.1 212.08,1304.53 236.64,1279.97 260.29,1279.97 ; 260.29,1279.97 299.71,1279.97 ; 260.29,1279.97 280,1299.68 ; 280,1299.68 299.71,1279.97
NetC11_1: C11.1 R28.1 U3.5 | length 863.9
  Top Layer w12: U3.5 319.37,1089.37 285,1055 285,618.51 378.78,524.73 378.89,524.73 411.85,491.77 C11.1 462.48,491.77 504.88,534.17 R28.1
NetC12_1: C12.1 R37.1 R44.2 U4.7 | length 365.2
  Top Layer w12: R37.1 805.66,223.7 795.91,233.45 795.91,247.68 750.59,293 U4.7 750.59,357.48 779.68,386.57 C12.1 848.82,474.65 R44.2
NetC12_2: C12.2 R37.2 R41.2 U4.6 | length 462.6
  Top Layer w12: U4.6 725.34,324.66 725.34,284.66 765,245 765,204.53 804.88,164.65 812.76,164.65 848.82,200.71 C12.2 856.06,304.53 R41.2
NetC14_2: C14.2 R36.1 R39.1 R40.1 U5.8 | length 535.2
  Top Layer w12: R36.1 R40.1 ; C14.2 1070,1392.4 R40.1 ; U5.8 1185,1316.14 ; R39.1 1290.67,1291.14 1210,1291.14 ; R40.1 1073.94,1309.53 1083.69,1299.78 1083.69,1297.03 1090.71,1290 1158.86,1290 ; 1158.86,1290 1210,1290 1210,1291.14 ; 1158.86,1290 1185,1316.14 ; 1185,1316.14 1210,1291.14
NetC15_1: C15.1 R44.1 U5.5 | length 945.3
  Top Layer w12: R44.1 847.76,538.7 894.69,491.77 C15.1 940.79,491.77 973.75,524.73 973.86,524.73 1235,785.87 1235,1183.66 U5.5
NetC16_1: C16.1 R13.1 U2.2 | length 363.4
  Top Layer w12: C16.1 503.44,929.16 490.84,929.16 450.22,969.78 439.75,969.78 R13.1 433.94,979.53 443.69,989.28 443.69,993.21 475.47,1025 585,1025 606,1046 606,1066 U2.2
NetC16_2: C16.2 R16.1 U2.3 | length 235.9
  Top Layer w12: C16.2 527.87,979.53 R16.1@619.41,979.53 ; R16.1@615,979.06 618.94,979.06 R16.1@619.41,979.53 ; R16.1 R16.1@619.41,979.53 ; U2.3 714.88,1075 R16.1@619.41,979.53
NetJ1_4: J1.4 R23.1 | length 246.9
  Top Layer w12: J1.4 877.4,2592.6 978.75,2491.25 978.75,2470.77 R23.1
NetJ1_5: J1.5 R25.1 | length 258
  Top Layer w12: J1.5 792.6,2485 865.59,2485 886.06,2464.53 R25.1
NetJ2_2: J2.2 R30.2 | length 815.6
  Top Layer w12: J2.2 171.4,538.6 246.4,538.6 310,475 310,255 460,105 605,105 633.82,133.82 R30.2
NetJ3_2: J3.2 R46.2 | length 830.3
  Top Layer w12: R46.2 723.82,131.18 760,95 885,95 1070,280 1070,470 1140,540 J3.2
NetP1_2: P1.2 R16.2 | length 201
  Top Layer w12: R16.2 620,885 730,775 P1.2
NetP1_4: P1.4 R13.2 | length 199.8
  Top Layer w12: R13.2@430,929.27 431.8,927.46 431.8,893.75 540,785.56 P1.4
NetR10_1: R10.1 U2.1 | length 259.5
  Top Layer w12: R10.1 348.94,920.47 390,961.54 390,1005 459.5,1074.5 514.5,1074.5 U2.1
NetR10_2: R10.2 U2.8 | length 472
  Top Layer w12: R10.2@345,973.42 345,1020 515,1190 U2.8
NetR11_2: R11.2 R20.1 U1.1 | length 170
  Top Layer w12: R20.1 664.53,1765.47 R11.2 704.7,1770 U1.1@735.41,1739.29
NetR14_2: R14.2 U2.6 | length 174.5
  Top Layer w12: U2.6 724,1384 744,1384 820.72,1460.72 840.25,1460.72 R14.2
NetR15_1: R15.1 U1.9 | length 189.3
  Top Layer w12: U1.9@755.41,1900.61 755.54,1900.49 755.54,1864.46 775,1845 860.59,1845 886.06,1870.47 R15.1
NetR17_1: R17.1 U1.10 | length 316.6
  Top Layer w12: U1.10@735.41,1900.71 735.41,1854.59 765,1825 926.06,1825 971.06,1870 R17.1
NetR18_2: R18.2 U1.4 | length 126.8
  Top Layer w12: 794.91,1775.1 794.69,1775.32 806.9,1787.53 832.47,1787.53 876.31,1743.69 876.31,1739.75 886.06,1730 R18.2
NetR26_2: R26.2 R33.1 U3.1 | length 157.1
  Top Layer w12: R26.2 169.53,1240.94 R33.1 231.12,1165 U3.1@240.41,1174.29
NetR29_1: R29.1 U3.9 | length 135.1
  Top Layer w10: U3.9 260.66,1336.06 260.66,1380.66 301.91,1421.91 321.44,1421.91 R29.1
NetR30_1: R30.1 U4.3 | length 109.6
  Top Layer w12: R30.1 637.76,223.7 647.5,233.45 647.5,239.75 648.23,240.48 U4.3
NetR31_1: R31.1 U3.10 | length 96.6
  Top Layer w12: U3.10 240.63,1426.1 R31.1
NetR32_2: R32.2 U3.4 | length 129
  Top Layer w12: U3.4@300,1206.44 300,1210.63 311.12,1221.76 327.62,1221.76 378.68,1170.69 385.25,1170.69 R32.2
NetR40_2: R40.2 R50.1 U5.1 | length 163.3
  Top Layer w12: R40.2 1074.53,1245.94 R50.1 1121.12,1170 U5.1@1145.41,1194.29
NetR45_1: R45.1 U5.9 | length 140.8
  Top Layer w12: U5.9@1165.54,1355.71 1165.54,1400.54 1175.72,1410.72 1211.31,1410.72 1241.06,1440.47 R45.1
NetR46_1: R46.1 U4.5 | length 113.7
  Top Layer w12: U4.5 699.41,245.59 710.13,234.87 710.13,233.45 719.88,223.7 R46.1
NetR47_1: R47.1 U5.10 | length 93.5
  Top Layer w12: U5.10@1145.41,1355.71 1145,1356.12 1145,1425.47 1146.31,1426.79 1146.31,1430.72 1156.06,1440.47 R47.1
NetR48_2: R48.2 U5.4 | length 149.9
  Top Layer w12: U5.4 1204.68,1230.32 1224.4,1250.03 1244.97,1250.03 1262.31,1232.69 1292.31,1232.69 R48.2
SCL: Q1.2 R25.2 R34.1 R38.1 | length 266.2
  Top Layer w12: R38.1 788.94,2289.53 798.69,2299.28 798.69,2303.21 829.45,2333.98 ; Q1.2 829.45,2333.98 ; R25.2 cw(c888.94,2405.47) 888.94,2404.41 R34.1 823.64,2404.41 829.45,2398.6 829.45,2333.98
SCL_5V: Q1.3 R17.2 R31.2 R35.1 R38.2 R47.2 | length 2092
  Top Layer w12: R31.2 248.94,1489.53 258.69,1499.28 258.69,1503.21 375,1619.53 375,1885 505,2015 885.12,2015 ; R38.2 900.03,2230.47 905,2225.5 Q1.3 902.94,2222.11 902.94,2107.35 R35.1 900,2104.41 900,2055 975,1980 R17.2 890,2014.06 ; R17.2@978.94,1929.06 1160,1747.99 R47.2
SDA: Q2.2 R23.2 R42.1 R49.1 | length 308.6
  Top Layer w12: R23.2 R23.2@988.94,2405.47 ; R49.1 1030,2360.47 ; R42.1 ccw(c1053.94,2404.41) 1053.94,2405.47 R23.2@988.94,2405.47 ; Q2.2 1093.58,2300.83 R23.2@988.94,2405.47
SDA_5V: Q2.3 R15.2 R29.2 R43.1 R45.2 R49.2 | length 2141.7
  Top Layer w12: R29.2 400,1559.53 400,1875 500,1975 v1(845,1975) 847.22,1972.78 847.22,1968.37 886.06,1929.53 R15.2 ; Q2.3 1155,2230.5 1150.03,2235.47 R49.2 1026.06,2235.47 950.19,2159.6 950.19,2109.22 R43.1 954.41,2068.74 964.08,2059.06 v1(964.08,2055.92) 1245,1775 R45.2
  Bottom Layer w12: v1(845,1975) 883.16,1975 v1(964.08,2055.92)
pads on no net: IC1.4 J1. U1.2 U1.6 U1.7 U3.2 U3.6 U3.7 U4.8 U4.9 U4.10 U4.12 U4.13 U4.14 U5.2 U5.6 U5.7

## Polygon pours and split planes (outlines as drawn)
GND on Top Layer "GND_L01_P001" (solid, pour order 1): 0,157.98 ccw(c157.98,157.98) 157.98,0 1220.47,0 ccw(c1220.47,159.53) 1380,159.53 1380,2833.1 ccw(c1218.1,2833.1) 1218.1,2995 160.35,2995 ccw(c160.35,2834.65) 0,2834.65 0,2825
GND on Bottom Layer "GND_L02_P000" (solid, pour order 0): 0,157.98 ccw(c157.98,157.98) 157.98,0 1220.47,0 ccw(c1220.47,159.53) 1380,159.53 1380,2833.1 ccw(c1218.1,2833.1) 1218.1,2995 160.35,2995 ccw(c160.35,2834.65) 0,2834.65 0,2825

## Keep-outs
Keep-Out Layer:
  the board outline again, w25

## Silkscreen, mask and mechanical layers (free items; w line width, h text height)
Top Overlay:
  text "P.MIAILHE - MSE V1" at 1340,1970 h80 r90
Bottom Overlay:
  drawing of 14 lines, arcs and shapes, not listed
Mechanical 1:
  the board outline again, w0.5